# Altium PCB PetTrackerPCB.PcbDoc (part 2 of 2)
Units mm, origin at the board's own origin, x right, y up, seen from the top; angles counter-clockwise.
Board outline 116.71 x 58.42 mm, 4 copper layers (Top Layer, GND Plane, PWR Plane, Bottom Layer), stack 0.868 mm thick; 35 components, 37 nets, 209 pads, 70 vias.
Unrouted connection lines stored in the file: 47.
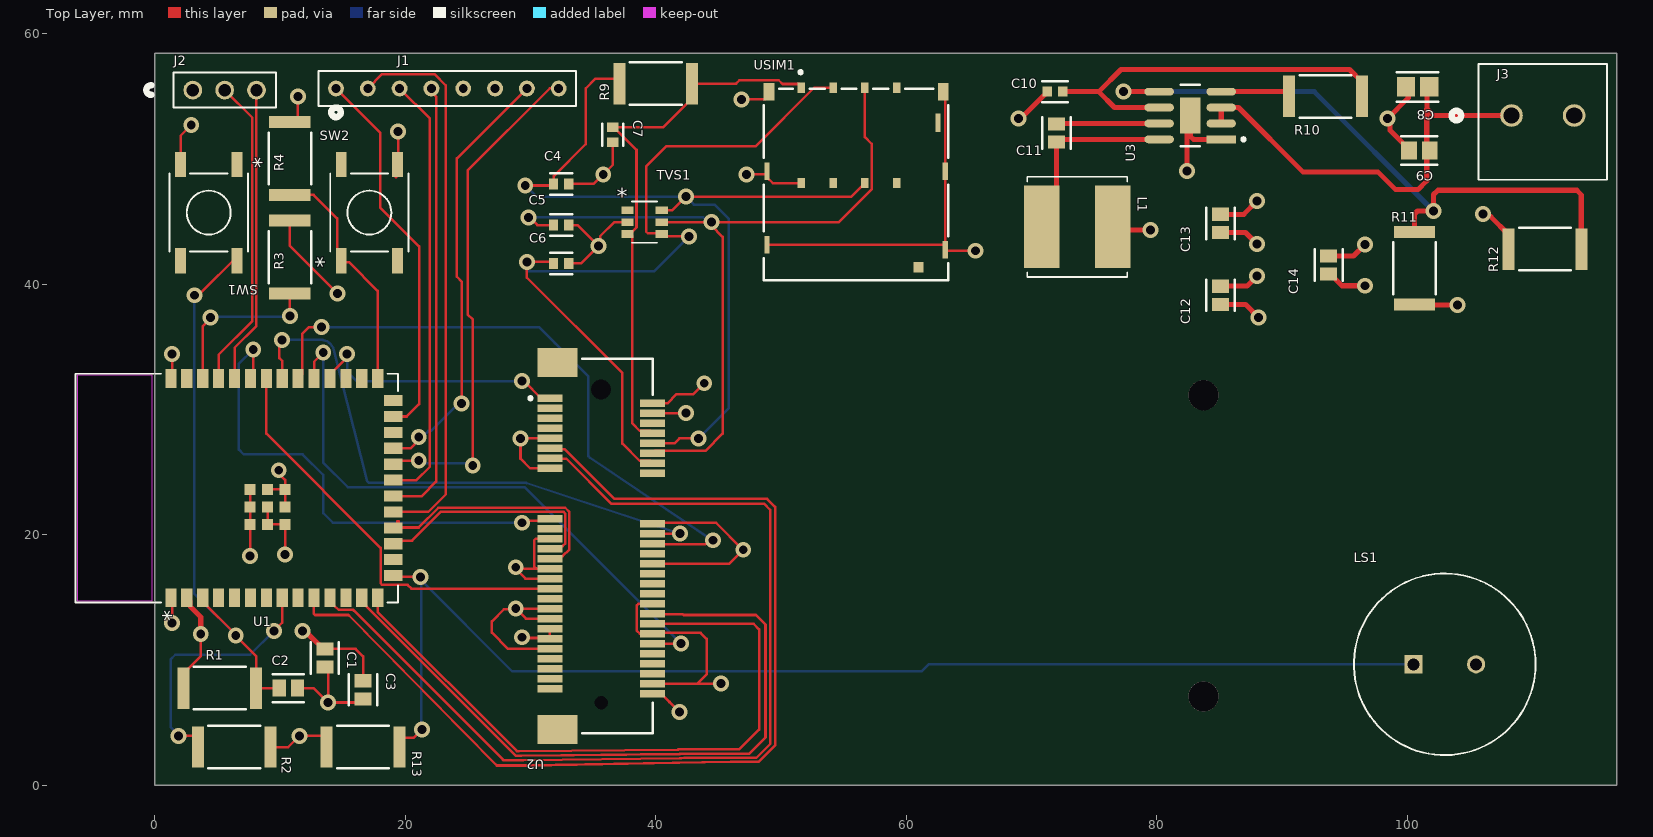
[diagram p0: Top Layer view]

## Via types
v1: diameter 1.27, hole 0.711, Top Layer to Bottom Layer, 69 vias
v2: diameter 1.27/1.27 (per signal layer), hole 0.711, Top Layer to Bottom Layer, 1 vias

## Nets (pads, with @x,y where several pads share a name; then routed paths per layer and width w, separated by ;. In a path a pad name is that pad's centre, name@x,y a point inside that pad or via, vN(x,y) a via of type N, cw(c..) or ccw(c..) an arc to the next point about the centre after c; other vN are vias at no path point) (continued)
USB_DP: (continued)
  Top Layer w0.203: U1.14 17.807,13.837 28.917,2.727 29.086,2.727 41.775,2.824 41.804,2.853 46.668,2.853 48.26,4.445 48.26,12.446 47.814,12.892 U2.38
Vin: C8.1 C9.1 J3.1 U3.2 U3.3 | length 50.1
  Top Layer w0.203: 101.565,53.964 101.588,53.987
  Top Layer w0.406: U3.2 U3.3 86.538,54.102 91.694,48.946 97.681,48.946 99.078,47.549 100.854,47.549 101.565,48.26 ; J3.1 102.108,53.467 101.588,53.987 ; 101.565,48.26 101.565,50.673 101.565,53.964 ; 101.565,48.26 101.565,53.964 ; 101.565,48.26 101.565,53.964 ; 101.588,53.987 C8.1@101.588,55.753 ; 101.588,53.987 C8.1@101.588,55.753 ; 101.588,53.987 C8.1@101.588,55.753
pads on no net: SW1.1 SW1.4 SW2.2 SW2.3 TVS1.1 U1.4 U1.5 U1.6 U1.7 U1.9 U1.12 U1.16 U1.24 U1.26 U1.28 U1.29 U1.39 U2.3 U2.5 U2.6 U2.7 U2.16 U2.19 U2.24 U2.28 U2.30 U2.32 U2.33 U2.44 U2.45 U2.46 U2.47 U2.48 U2.49 U2.51 U2.MH1 U2.MH2 U2.MP1 U2.MP2 USIM1.4 USIM1.7 USIM1.C4 USIM1.C6 USIM1.C8

## Polygon pours and split planes (outlines as drawn)
GND on GND Plane (split plane): 116.203,0.51 0.51,0.51 0.51,57.91 116.203,57.91
+3V3 on PWR Plane (split plane): 116.203,0.51 0.51,0.51 0.51,57.91 116.203,57.91

## Text inside footprints (layer, text, board x,y; h text height)
SW1: Top Overlay "*" at 7.305,50.14 h1.27 r270; Top 3D Body "*" at 5.781,48.654 h1.27 r270
SW2: Top Overlay "*" at 14.158,41.3 h1.27 r90; Top 3D Body "*" at 15.682,42.786 h1.27 r90
TVS1: Top Overlay "*" at 36.898,46.391 h1.27; Top 3D Body "*" at 38.303,45.136 h1.27
U1: Top Overlay "*" at 1.932,13.084 h1.27 r90; Top 3D Body "*" at 1.932,16.039 h1.27 r90